# Altium PCB EVB_WBS2_V1.0.0.PcbDoc
Units mm, origin at the board's own origin, x right, y up, seen from the top; angles counter-clockwise.
Board outline 77.17 x 84.58 mm, 2 copper layers (Top, Bottom), stack 1.569 mm thick; 33 components, 22 nets, 145 pads, 163 vias.
Unrouted connection lines stored in the file: 104.
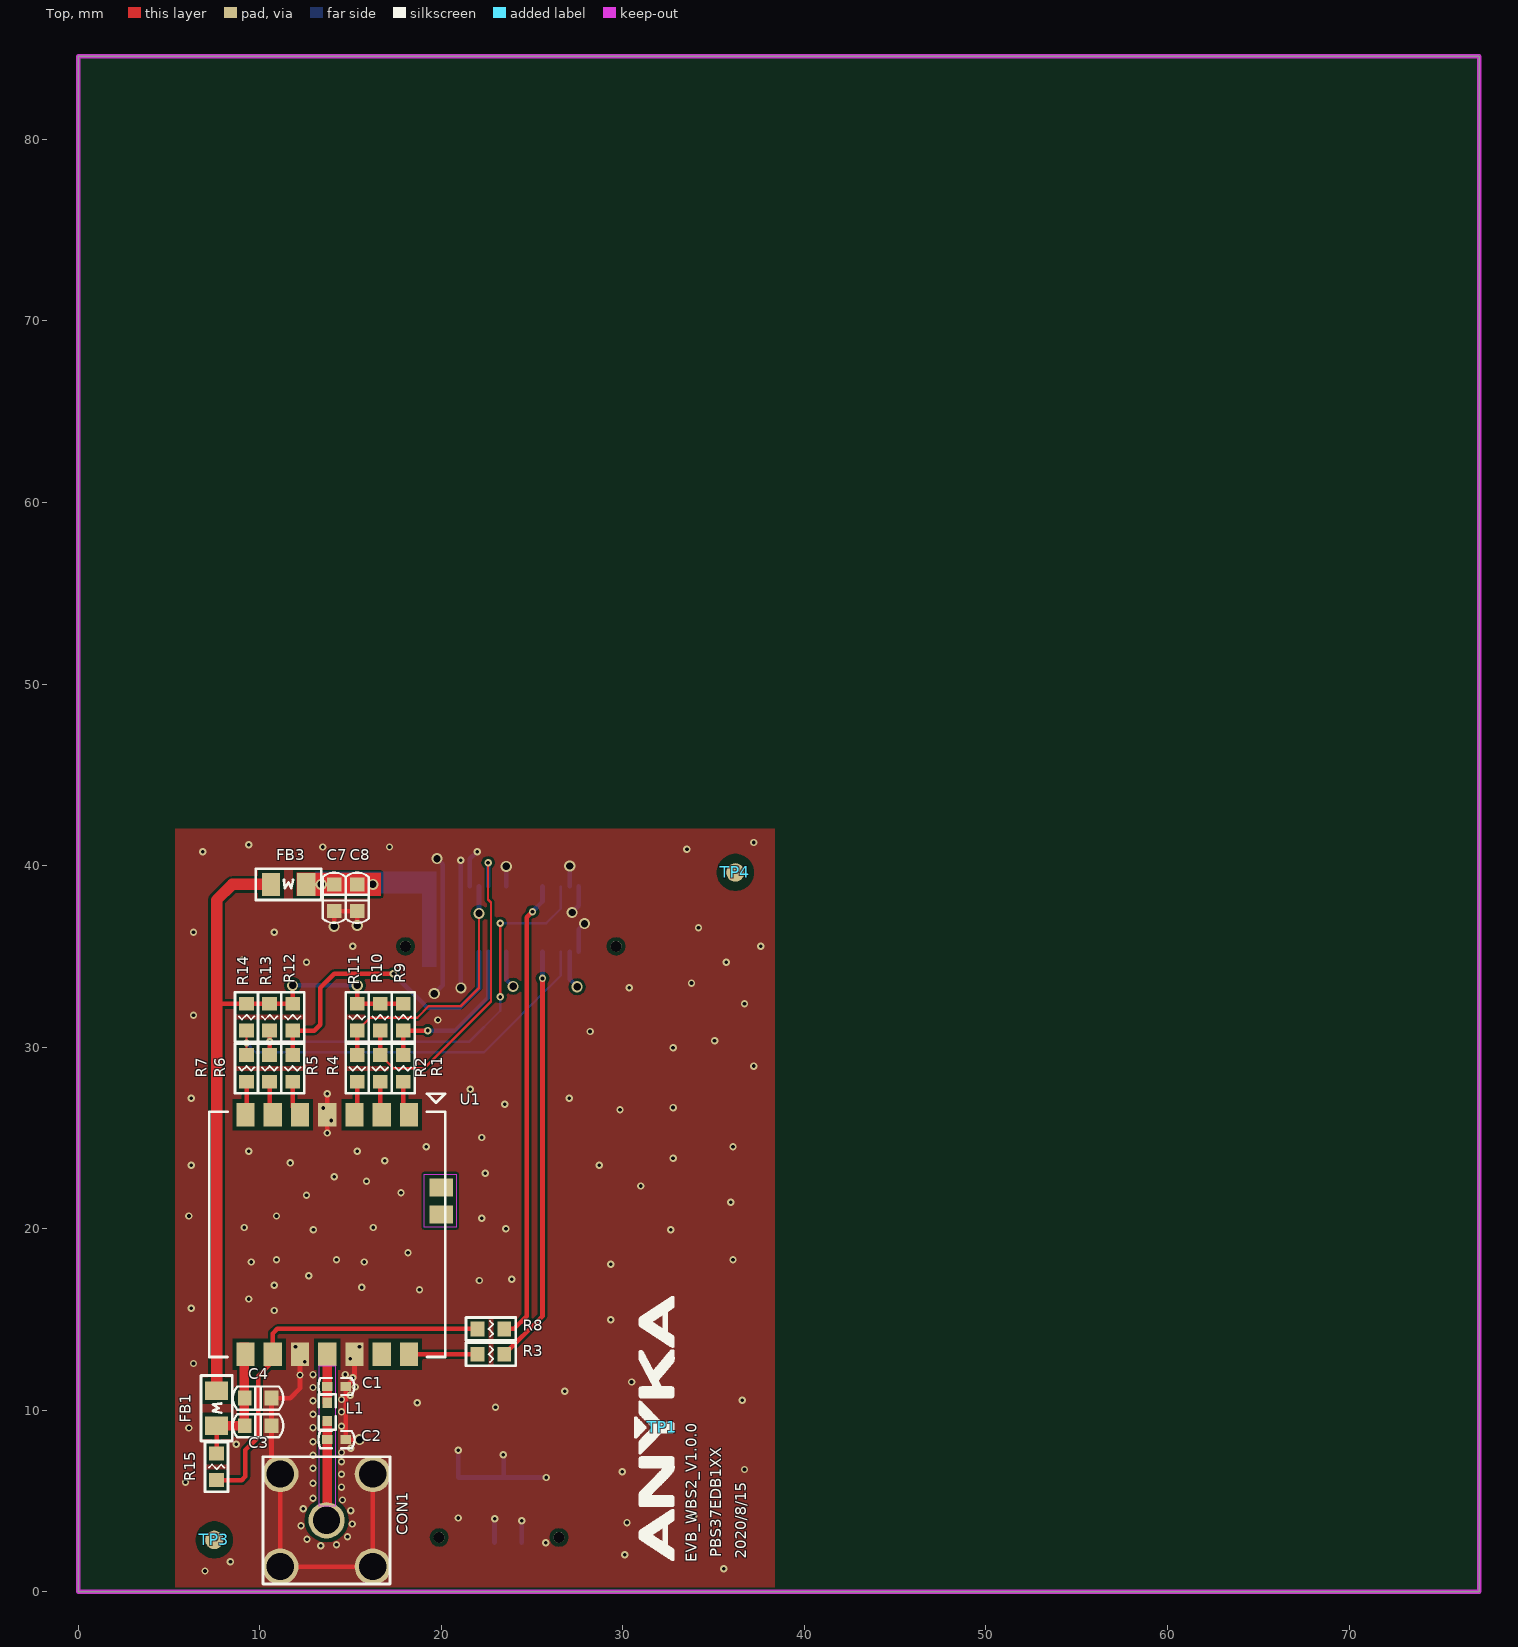
[diagram p0: Top view]
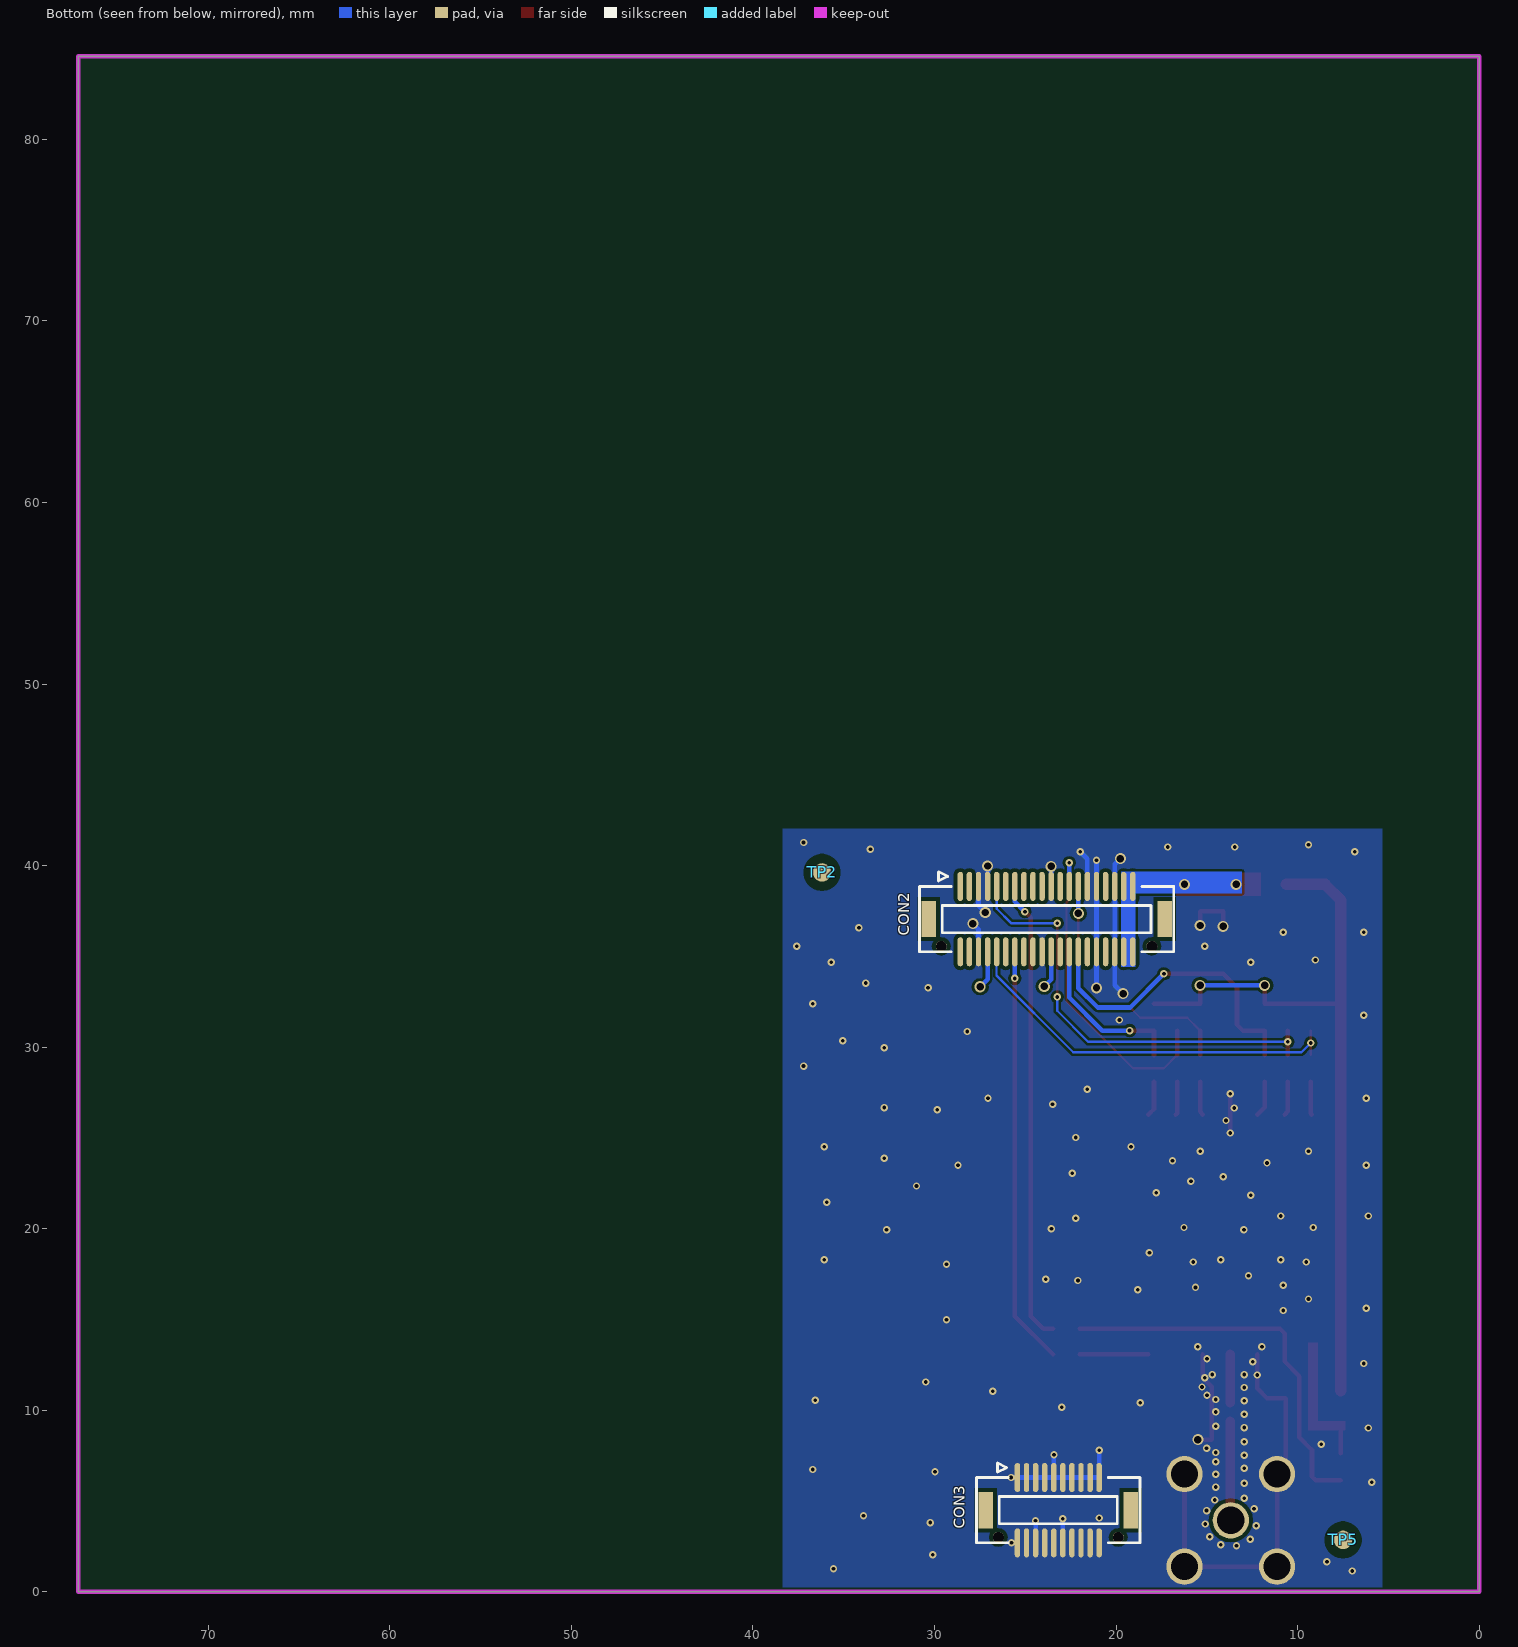
[diagram p1: Bottom view, seen from below]

## Layer stack, top to bottom
Solder Mask Top: solder mask 0.0102, Solder Resist, Dk 3.5
Top: signal copper 0.035
Dielectric 1: dielectric 1.4986, FR-4, Dk 4.3
Bottom: signal copper 0.035
Solder Mask Bottom: solder mask 0.0102, Solder Resist, Dk 3.5

## Board outline
0,0 0,84.582 77.165,84.582 77.165,0

## Design rules (kind name [scope] priority, off if disabled: settings)
AssemblyTestPointUsage [All] p1 off:
AssemblyTestpoint [All] p1 off: testpointundercomponent=TRUE minsize=1.016 maxsize=2.54 preferedsize=1.524 minholesize=0 maxholesize=1.016 preferedholesize=0.813 testpointgrid=0.025 usegrid=TRUE gridtolerance=0 allowsidetop=TRUE allowsidebottom=TRUE
Clearance [All] p1: gap=0.127 ignorepadtopadclearanceinfootprint=TRUE except(0: Arc-Text Track-Text SMDPad-Text THPad-Text Via-Text Fill-Text Poly-Text Region-Text Text-Text; 0.152: Via-Fill Via-Poly Via-Region; 0.203: SMDPad-Fill SMDPad-Poly SMDPad-Region THPad-Fill THPad-Poly THPad-Region)
Clearance Clearance_1 [All] p2: gap=0 ignorepadtopadclearanceinfootprint=TRUE
ComponentClearance "ComponentClearance - Default - DEFAULT" [All] p1 off: gap=0 collisioncheckmode=3 verticalgap=0.254 showdistances=FALSE
DiffPairsRouting [All] p1 off: maxlimit=0.254 minlimit=0.254 mostfreqgap=0.254 toplayer_minwidth=0.381 toplayer_maxwidth=0.381 toplayer_prefwidth=0.381 bottomlayer_minwidth=0.381 bottomlayer_maxwidth=0.381 bottomlayer_prefwidth=0.381 maxuncoupledlength=12.7
FabricationTestPointUsage [All] p1 off: valid=0 allowmultiple=FALSE
FabricationTestpoint [All] p1 off: side=3 testpointundercomponent=TRUE minsize=1.016 maxsize=2.54 preferedsize=1.524 minholesize=0 maxholesize=1.016 preferedholesize=0.813 testpointgrid=0.025 allowsidetop=TRUE allowsidebottom=TRUE usegrid=TRUE gridtolerance=0
FanoutControl Fanout_BGA [IsBGA] p1 off: bgadir=Out bgaviamode=Centered fanoutstyle=Auto fanoutdirection=Alternating viagrid=0.025 // Fanout_BGA (Default Rule)
FanoutControl Fanout_LCC [IsLCC] p2 off: bgadir=Out bgaviamode=Centered fanoutstyle=Auto fanoutdirection=Alternating viagrid=0.025 // Fanout_LCC (Default Rule)
FanoutControl Fanout_Small [(CompPinCount < 5)] p3 off: bgadir=Out bgaviamode=Centered fanoutstyle=Auto fanoutdirection=OutThenIn viagrid=0.025 // Fanout_Small (Default Rule)
FanoutControl Fanout_SOIC [IsSOIC] p4 off: bgadir=Out bgaviamode=Centered fanoutstyle=Auto fanoutdirection=Alternating viagrid=0.025 // Fanout_SOIC (Default Rule)
FanoutControl Fanout_Default [All] p5 off: bgadir=Out bgaviamode=Centered fanoutstyle=Auto fanoutdirection=Alternating viagrid=0.025 // Fanout_Default (Default Rule)
Height [All] p1 off: minheight=0 maxheight=25.4 prefheight=12.7
HoleSize [All] p1 off: absolutevalues=TRUE maxlimit=2.54 minlimit=0.025 maxpercent=80.000 minpercent=20.000
HoleToHoleClearance "HoleToHoleClearance - Default - DEFAULT" [All] p1 off: gap=0 allowstackedmicrovias=TRUE
LayerPairs [All] p1 off: enforce=TRUE
Length "Default Length" [All] p1 off: maxlimit=1270 minlimit=0
MaxMinImpedance "Default Impedance" [All] p1 off: minimum=50.00 maximum=150.0
MinimumSolderMaskSliver [All] p1 off: minsoldermaskwidth=0.254
NetAntennae [All] p1 off: netantennaetolerance=0
ParallelSegment "Default Parallel Segment Same Layer" [All] p1 off: limit=25.4 gap=5.08
ParallelSegment "Default Parallel Segment Adjasent" [All] p2 off: limit=25.4 gap=5.08
PasteMaskExpansion [All] p1 off: expansion=0.102
PlaneClearance [All] p1 off: clearance=0.508
PlaneConnect [All] p1 off: planeconnectstyle=Direct reliefexpansion=0.508 reliefentries=4 reliefconductorwidth=0.254 reliefairgap=0.254
PolygonConnect [All] p1: connectstyle=Direct reliefconductorwidth=0.254 reliefentries=4 polygonreliefangle="90 Angle" airgapwidth=0.254
RoutingCorners [All] p1 off: cornerstyle=45-Degree minsetback=0.254 maxsetback=0.254
RoutingLayers "RoutingLayers - Default - DEFAULT" [All] p1 off: top layer_v5=TRUE bottom layer_v5=TRUE
RoutingPriority "RoutingPriority - Default - DEFAULT" [All] p1 off: routingpriority=0
RoutingTopology "Default Routing Topology" [All] p1 off: topology=Shortest
RoutingVias "RoutingVias - Default - DEFAULT" [All] p1 off: holewidth=0.203 width=0.406 viastyle="Through Hole" minholewidth=0.203 minwidth=0.406 maxholewidth=0.406 maxwidth=0.61
SMDToCorner "SMDToCorner - Default - DEFAULT" [All] p1 off: distance=0
ShortCircuit ShortCircuit_1 [InNet('GND') vs InNet('GND')] p2: allowed=TRUE
SilkToSilkClearance [All] p1 off: silktosilkclearance=0.254
SilkToSolderMaskClearance [IsPad] p1 off: minsilkscreentomaskgap=0.254 clearancetoexposedcopper=TRUE
SolderMaskExpansion [All] p1 off: expansion=0.102 istentingtop=TRUE useseparateexpansions=TRUE expansionbottom=0.102 istentingbottom=TRUE
Width "Default Width" [All] p1 off: maxlimit=2.54 minlimit=0.127 preferedwidth=0.127 minimp=50.000000 maximp=50.000000 favimp=50.000000
4 further rules are at their usual default settings.

## Classes and differential pairs
component class ATBM6031: C1 C2 C3 C4 C7 C8 CON1 CON2 CON3 FB1 FB3 L1 R1 R2 R3 R4 R5 R6 R7 R8 R9 R10 R11 R12 R13 R14 R15 U1

## Components (designator, comment, footprint, x,y, rotation, side; value= is the part's Value field where it differs from the comment)
C1 "0.5pF" C0402 14.224,11.303 r0 top
C2 "0.5pF" C0402 14.224,8.382 r0 top
C3 "22uF" C0603 9.906,9.144 r0 top
C4 "100nF" C0603 9.906,10.668 r0 top
C7 "4.7uF" C0603 14.097,38.227 r270 top
C8 "10uF" C0603 15.367,38.227 r270 top
CON1 "SMA-KHD-92105001" SMA-KHD-92105001 13.678,3.934 r0 top value=SMA-KHD
CON2 "CON20X2_0MM5_BTB_DF12" CON20X2_0MM5_BTB_DF12_N 23.825,37.053 r0 bottom locked
CON3 "CON10X2_0MM5_BTB_DF12" CON10X2_0MM5_BTB_DF12_N 23.18,4.492 r0 bottom
FB1 "FB0805" FB0805 7.62,10.109 r270 top
FB3 "FB0805" FB0805 11.582,38.964 r0 top
L1 "1.0nH" L0402 13.716,9.906 r270 top
R1 "0R" R0603 17.907,28.829 r90 top
R2 "0R" R0603 16.637,28.829 r90 top
R3 "NC/0R" R0603 22.733,13.081 r180 top
R4 "0R" R0603 15.367,28.829 r90 top
R5 "0R" R0603 11.811,28.829 r90 top
R6 "0R" R0603 10.541,28.829 r90 top
R7 "0R" R0603 9.271,28.829 r90 top
R8 "0R" R0603 22.733,14.478 r180 top
R9 "10K" R0603 17.907,31.648 r90 top
R10 "10K" R0603 16.637,31.648 r90 top
R11 "NC/10K" R0603 15.367,31.648 r90 top
R12 "NC/10K" R0603 11.811,31.648 r90 top
R13 "10K" R0603 10.541,31.648 r90 top
R14 "10K" R0603 9.271,31.648 r90 top
R15 "10K" R0603 7.62,6.883 r270 top
TP1 "LOGO_ANYKA" LOGO_ANYKA 32.156,9.055 r90 top
TP2 "FIDU_40" FIDU_40 36.195,39.624 r180 bottom
TP3 "FIDU_40" FIDU_40 7.493,2.857 r0 top
TP4 "FIDU_40" FIDU_40 36.195,39.624 r0 top
TP5 "FIDU_40" FIDU_40 7.493,2.857 r180 bottom
U1 "ATBM6031" ATBM6031 13.716,19.685 r270 top value=NC/R8782

## Footprints (in the part's own frame and the unit in brackets; to place one, negate y for a bottom-side part, rotate by r counter-clockwise, add the part's x,y. Pads: shape width x height; smd on the part's side, far side on the other; paste and mask are expansions set on the pad)
ATBM6031 [mm]
  rect 1.3x1 smd: 1(-6.6,4.5) 2(-6.6,3) 3(-6.6,1.5) 4(-6.6,0) 5(-6.6,-1.5) 6(-6.6,-3) 7(-6.6,-4.5) 8(6.6,-4.5) 9(6.6,-3) 10(6.6,-1.5) 11(6.6,0) 12(6.6,1.5) 13(6.6,3) 14(6.6,4.5)
  rect 1x1.3 smd: 15(-1.092,6.274) 16(-2.591,6.274)
  silkscreen extent -7.75,-6.5 6.75,6.5
C0402 [mil]
  rect 22x20 smd: 1(-20,0) 2(20,0)
  silkscreen extent -39,-19 39,18
C0603 [mil]
  rect 30x32 smd: 1(-29,0) 2(29,0)
  silkscreen extent -55,-25 55,25
CON10X2_0MM5_BTB_DF12_N [mm]
  oval 0.3x1.6 smd: 1(2.25,-1.8) 2(2.25,1.8) 3(1.75,-1.8) 4(1.75,1.8) 5(1.25,-1.8) 6(1.25,1.8) 7(0.75,-1.8) 8(0.75,1.8) 9(0.25,-1.8) 10(0.25,1.8) 11(-0.25,-1.8) 12(-0.25,1.8) 13(-0.75,-1.8) 14(-0.75,1.8) 15(-1.25,-1.8) 16(-1.25,1.8) 17(-1.75,-1.8) 18(-1.75,1.8) 19(-2.25,-1.8) 20(-2.25,1.8)
  rect 0.8x2 smd: 21(-4,0) 22(4,0)
  round 0.6 hole 0.6 unplated: 23(-3.3,1.5) 24(3.3,1.5)
  silkscreen extent -4.5,-2.6 4.5,1.8
CON20X2_0MM5_BTB_DF12_N [mm]
  oval 0.3x1.6 smd: 1(4.75,-1.8) 2(4.75,1.8) 3(4.25,-1.8) 4(4.25,1.8) 5(3.75,-1.8) 6(3.75,1.8) 7(3.25,-1.8) 8(3.25,1.8) 9(2.75,-1.8) 10(2.75,1.8) 11(2.25,-1.8) 12(2.25,1.8) 13(1.75,-1.8) 14(1.75,1.8) 15(1.25,-1.8) 16(1.25,1.8) 17(0.75,-1.8) 18(0.75,1.8) 19(0.25,-1.8) 20(0.25,1.8) 21(-0.25,-1.8) 22(-0.25,1.8) 23(-0.75,-1.8) 24(-0.75,1.8) 25(-1.25,-1.8) 26(-1.25,1.8) 27(-1.75,-1.8) 28(-1.75,1.8) 29(-2.25,-1.8) 30(-2.25,1.8) 31(-2.75,-1.8) 32(-2.75,1.8) 33(-3.25,-1.8) 34(-3.25,1.8) 35(-3.75,-1.8) 36(-3.75,1.8) 37(-4.25,-1.8) 38(-4.25,1.8) 39(-4.75,-1.8) 40(-4.75,1.8)
  rect 0.8x2 smd: 41(-6.5,0) 42(6.5,0)
  round 0.6 hole 0.6 unplated: 43(-5.8,1.5) 44(5.8,1.5)
  silkscreen extent -7,-2.6 7,1.8
FB0805 [mil]
  rect 40x50 smd: 1(-38,0) 2(38,0)
  silkscreen extent -71,-34 71,34
FIDU_40 [mil]
  round 40 smd far side: 1(0,0)
  round 40 smd: 1(0,0)
  Top pour cut-out: 40,0 40,3.94 38.46,11.67 35.45,18.95 31.07,25.5 25.5,31.07 18.95,35.45 11.67,38.46 3.94,40 0,40 -3.94,40 -11.67,38.46 -18.95,35.45 -25.5,31.07 -31.07,25.5 -35.45,18.95 -38.46,11.67 -40,3.94 -40,0 -40,-3.94 -38.46,-11.67 -35.45,-18.95 -31.07,-25.5 -25.5,-31.07 -18.95,-35.45 -11.67,-38.46 -3.94,-40 0,-40 3.94,-40 11.67,-38.46 18.95,-35.45 25.5,-31.07 31.07,-25.5 35.45,-18.95 38.46,-11.67 40,-3.94 40,0
  Bottom pour cut-out: 40,0 40,3.94 38.46,11.67 35.45,18.95 31.07,25.5 25.5,31.07 18.95,35.45 11.67,38.46 3.94,40 0,40 -3.94,40 -11.67,38.46 -18.95,35.45 -25.5,31.07 -31.07,25.5 -35.45,18.95 -38.46,11.67 -40,3.94 -40,0 -40,-3.94 -38.46,-11.67 -35.45,-18.95 -31.07,-25.5 -25.5,-31.07 -18.95,-35.45 -11.67,-38.46 -3.94,-40 0,-40 3.94,-40 11.67,-38.46 18.95,-35.45 25.5,-31.07 31.07,-25.5 35.45,-18.95 38.46,-11.67 40,-3.94 40,0
L0402 [mil]
  rect 22x20 smd: 1(-20,0) 2(20,0)
  silkscreen extent -38,-19 38,19
LOGO_ANYKA [mm]
  silkscreen extent -7.34,-0.7 7.22,1.5
R0603 [mil]
  rect 30x32 smd: 1(-29,0) 2(29,0)
  silkscreen extent -54,-25 54,25
SMA-KHD-92105001 [mm]
  round 1.999 hole 1.5: 1(0,0) 2(-2.55,2.55) 3(2.55,2.55) 4(-2.55,-2.55) 5(2.55,-2.55)
  silkscreen extent -3.5,-3.5 3.5,3.5

## Part data
C1 C2: library part CC0200R52XX, "C/C,0.5pF,50V,±0.05pF ,0402,Murata", Catalog=陶瓷电容, Part Number=CC0200R52XX
C3: library part CC0302260XX, "C/C,22uF,16V,+/-20%,0603", Catalog=陶瓷电容, Part Number=CC0302260XX
C4: library part CC0301040XX, "C/C,100nF,25V,+/-5%,0603", Catalog=陶瓷电容, Part Number=CC0301040XX
C7: library part CC0304750XX, "C/C,4.7uF,25V,+/-5%,0603", Catalog=陶瓷电容, Part Number=CC0304750XX
C8: library part CC0301060XX, "C/C,10uF,25V,+/-5%,0603", Catalog=陶瓷电容, Part Number=CC0301060XX
CON1: library part CNRFM0515XX, "SMA-KWE,5pin,Normal，弯头正脚内孔，6*6*13&14.5；", Part Number_AK=CNRFM0501XX, Catalog=Connector, Part Number=CNRFM0515XX, PCB DECAL=SMA-KHD-92105001, SOURCE_PATH=I:\PROJECTFILES\CADENCE\AD11\AD11_AK9806_V2.1_20120202.DSN
CON2: library part CNBBM4000XX, "0.5mm ，BTB2*20Pin，SMT，公座，H3.0，DF12#(3.0)-40DS-0.5", Catalog=Connector, Part Number=CNBBM4000XX, PCB DECAL=CON20X2_0MM5_BTB_DF12_BOTTOM
CON3: library part CNBBM2000XX, "0.5mm ，BTB2*10Pin，SMT，公座，H3.0，DF12#(3.0)-20DS-0.5", Catalog=Connector, Part Number=CNBBM2000XX, PCB DECAL=CON10X2_0MM5_BTB_DF12_BOTTOM
FB1 FB3: library part BE0503010XX, "BEAD,PZ2012U301-1R5TF,300R,100MHz,0805", Catalog=贴片磁珠, Part Number=BE0503010XX, Part Number_AK=BE0503010XX, PCB DECAL=FB0805
L1: library part CL0201R00XX, "C/L,1.0nH,0402,LQG15HS1N0S02D", Catalog=贴片电感, Part Number=CL0201R00XX
R1 R2 R3 R4 R5 R6 R7 R8: library part CR0300000XX, "Res,0R,1/10W,+/-5%,0603", Catalog=贴片电阻, Part Number=CR0300000XX
R9 R10 R11 R12 R13 R14 R15: library part CR0310020XX, "Res,10K,1/10W,+/-1%,0603", Catalog=贴片电阻, Part Number=CR0310020XX
U1: library part MDWIFI035XX, "SDIO2.0 WIFI Module,WD_ATBM6031,13.5 *13*1.6mm, ATBM6031,13pin", Part Number_AK=MDWIFI011XX, Catalog=模块, Part Number=MDWIFI035XX, PCB DECAL=BL_R8801MS1

## Via types
v1: diameter 0.406, hole 0.203, Top to Bottom, tented both sides, 146 vias
v2: diameter 0.61, hole 0.406, Top to Bottom, tented both sides, 17 vias

## Nets (pads, with @x,y where several pads share a name; then routed paths per layer and width w, separated by ;. In a path a pad name is that pad's centre, name@x,y a point inside that pad or via, vN(x,y) a via of type N, cw(c..) or ccw(c..) an arc to the next point about the centre after c; other vN are vias at no path point)
GND: C1.2 C2.2 C3.2 C4.2 C7.2 C8.2 CON1.2 CON1.3 CON1.4 CON1.5 CON2.5 CON2.6 CON2.7 CON2.20 CON2.21 CON2.29 CON2.31 CON2.32 CON2.35 CON2.36 CON3.1 CON3.2 CON3.3 CON3.4 CON3.5 CON3.6 CON3.7 CON3.8 CON3.9 CON3.10 CON3.11 CON3.12 CON3.13 CON3.14 CON3.15 CON3.16 CON3.17 CON3.18 CON3.19 CON3.20 U1.4 U1.10 U1.12 | length 66.6
  Top w0.254: U1.10 v1(12.216,11.938) 12.216,11.2 11.684,10.668 C4.2 C3.2 10.643,6.969 CON1.2 CON1.4 CON1.5 CON1.3 ; v1(13.716,25.273) U1.4 v1(13.716,27.432) ; v2(14.097,36.652) C7.2 C8.2 v2(15.367,36.703) ; U1.12 15.216,11.787 C1.2 C2.2 v2(15.494,8.382)
  Bottom w0.254: v2(19.609,32.944) 20.075,33.41 CON2.36 CON2.35 20.075,40.072 v2(19.761,40.386) ; v1(20.93,7.798) CON3.19 CON3.17 CON3.15 CON3.13 CON3.11 CON3.9 ; v2(21.075,33.267) CON2.32 CON2.31 v1(21.075,40.291) ; CON2.29 21.575,40.371 v1(21.971,40.767) ; CON3.12 22.93,4.007 v1(22.936,4.013) ; v1(23.419,7.544) 23.43,7.533 CON3.9 ; CON2.21 v2(23.575,39.958) ; CON3.6 24.43,3.907 v1(24.435,3.912) ; v1(25.781,6.292) CON3.1 CON3.3 CON3.5 CON3.7 CON3.9 ; CON2.7 v2(27.075,39.981) ; v2(27.203,37.414) 27.575,37.786 CON2.5 ; CON2.6 27.575,36.491 v2(27.889,36.805)
  other v1: 6.985,1.143 35.56,1.27 8.382,1.651 30.099,2.032 13.36,2.54 14.224,2.591 25.756,2.692 12.598,2.896 14.834,3.023 12.268,3.632 15.088,3.734 30.226,3.81 20.93,4.064 33.909,4.191 15.011,4.47 12.395,4.572 14.554,5.055 12.929,5.156 14.503,5.766 12.929,5.969 5.905,6.032 14.503,6.477 29.972,6.604 36.703,6.731 12.929,6.807 14.503,7.163 12.929,7.518 14.503,7.671 15.011,7.899 8.7,8.128 12.929,8.255 6.096,9.017 12.929,9.042 14.503,9.119 12.929,9.779 14.503,9.906 22.987,10.16 18.669,10.414 12.929,10.516 36.576,10.541 14.503,10.592 14.986,10.82 26.797,11.049 12.929,11.252 15.265,11.278 30.48,11.557 15.113,11.786 12.929,11.963 14.707,11.963 6.35,12.573 12.471,12.675 14.986,12.827 11.963,13.487 15.494,13.487 29.337,14.986 10.795,15.494 6.223,15.621 9.398,16.129 18.796,16.637 15.621,16.764 10.795,16.891 22.098,17.145 23.876,17.209 12.7,17.399 29.337,18.034 9.525,18.161 15.748,18.161 10.922,18.288 14.224,18.288 36.068,18.288 18.161,18.669 12.954,19.939 32.639,19.939 23.558,20.002 9.144,20.066 16.256,20.066 22.225,20.574 6.096,20.701 10.922,20.701 35.941,21.463 12.573,21.844 17.78,21.971 30.988,22.352 15.875,22.606 14.097,22.86 22.415,23.05 6.223,23.495 28.702,23.495 11.684,23.622 16.891,23.749 32.766,23.876 9.398,24.257 15.367,24.257 19.177,24.511 36.068,24.511 22.225,25.019 13.945,25.959 29.845,26.543 13.487,26.645 32.766,26.67 23.495,26.86 6.223,27.178 27.051,27.178 21.59,27.686 37.211,28.956 32.766,29.972 35.052,30.353 28.194,30.861 19.812,31.496 6.35,31.75 36.703,32.385 30.353,33.274 33.782,33.528 12.573,34.671 35.687,34.671 9.017,34.798 15.113,35.56 37.592,35.56 6.35,36.322 10.795,36.322 34.163,36.576 6.858,40.767 33.528,40.894 13.462,41.021 17.145,41.021 9.398,41.148 37.211,41.275
NETC1_1: C1.1 L1.1 U1.11 | length 2.7
  Top w0.533: L1.1 C1.1 U1.11
NETC2_1: C2.1 CON1.1 L1.2 | length 5.5
  Top w0.533: CON1.1 13.716,3.972 C2.1 L1.2
NETC3_1: C3.1 C4.1 FB1.2 R15.1 U1.8 | length 7
  Top w0.254: R15.1 FB1.2 C3.1 C4.1 9.216,10.715 U1.8
NETC7_1: C7.1 C8.1 CON2.37 CON2.38 CON2.39 CON2.40 FB3.2 | length 11.2
  Top w0.254: FB3.2 v2(13.386,38.964) C7.1 C8.1
  Top w0.635: C8.1 v2(16.231,38.964)
  Bottom w0.254: v2(16.231,38.964) 18.964,38.964 CON2.39 ; CON2.38 CON2.40 CON2.39 ; CON2.37 CON2.39
NETR1_1: R1.1 U1.1 | length 1.9
  Top w0.254: R1.1 17.907,26.594 U1.1
NETR2_1: R2.1 U1.2 | length 1.8
  Top w0.254: R2.1 16.637,26.364 U1.2
NETR3_2: R3.2 U1.14 | length 3.8
  Top w0.254: U1.14 R3.2
NETR4_1: R4.1 U1.3 | length 1.9
  Top w0.254: U1.3 15.367,26.436 R4.1
NETR5_1: R5.1 U1.5 | length 2
  Top w0.254: R5.1 11.811,26.69 U1.5
NETR6_1: R6.1 U1.6 | length 1.9
  Top w0.254: R6.1 10.541,26.46 U1.6
NETR7_1: R7.1 U1.7 | length 1.8
  Top w0.254: U1.7 9.271,26.34 R7.1
NETR8_2: R8.2 R15.2 U1.9 | length 21.6
  Top w0.254: R15.2 9.004,6.147 9.207,6.35 9.207,7.81 9.906,8.509 9.906,11.874 10.716,12.685 U1.9 10.716,14.224 10.97,14.478 19.698,14.478 R8.2
WIFI_3V3: FB1.1 FB3.1 R9.2 R10.2 R11.2 R12.2 R13.2 R14.2 | length 42.7
  Top w0.254: 7.62,32.385 R14.2 R13.2 R12.2 v2(11.811,33.401) ; v2(15.367,33.401) R11.2 R10.2 R9.2
  Top w0.635: FB1.1 7.62,32.385 7.62,38.1 8.484,38.964 FB3.1
  Bottom w0.254: v2(11.811,33.401) v2(15.367,33.401)
WIFI_CLK: CON2.28 R5.2 R12.1 | length 17.3
  Top w0.254: R5.2 R12.1 13.005,30.912 13.335,31.242 13.335,33.274 14.097,34.036 v1(17.361,34.036)
  Bottom w0.254: v1(17.361,34.036) 19.215,32.182 21.006,32.182 22.075,33.251 CON2.28
WIFI_CMD: CON2.27 R4.2 R11.1 | length 14.6
  Top w0.127: R11.1 16.078,31.623 18.669,31.623 19.304,32.258 21.082,32.258 22.075,33.251 v2(22.075,37.366)
  Top w0.254: R4.2 R11.1
  Bottom w0.254: v2(22.075,37.366) CON2.27
WIFI_D0: CON2.9 R6.2 R13.1 | length 24.5
  Top w0.127: v1(23.241,32.766) v1(23.241,36.83)
  Top w0.254: R6.2 v1(10.541,30.29) R13.1
  Bottom w0.127: v1(10.541,30.29) 13.97,30.29 21.526,30.29 23.241,32.004 v1(23.241,32.766) ; v1(23.241,36.83) 25.781,36.83 26.575,37.624 CON2.9
WIFI_D1: CON2.10 R7.2 R14.1 | length 22.6
  Top w0.127: R7.2 R14.1 v1(9.271,30.226)
  Bottom w0.127: v1(9.271,30.226) 9.779,29.718 22.352,29.718 26.581,33.947 26.581,35.247 CON2.10
WIFI_D2: CON2.26 R1.2 R9.1 | length 9.3
  Top w0.254: R1.2 R9.1 v1(19.253,30.912)
  Bottom w0.254: v1(19.253,30.912) 20.752,30.912 22.575,32.735 CON2.26
WIFI_D3: CON2.25 R2.2 R10.1 | length 18.3
  Top w0.127: R2.2 17.374,28.829 19.05,28.829 22.733,32.512 22.733,37.973 22.575,38.131 v1(22.575,40.163)
  Top w0.254: R2.2 R10.1
  Bottom w0.254: CON2.25 v1(22.575,40.163)
WIFI_INT: CON2.14 R3.1 | length 23
  Top w0.254: R3.1 25.575,15.187 v1(25.575,33.785)
  Bottom w0.254: v1(25.575,33.785) CON2.14
WIFI_RST: CON2.13 R8.1 | length 25.6
  Top w0.254: R8.1 24.003,14.478 24.701,15.176 24.701,32.067 24.701,37.148 v1(25.019,37.465)
  Bottom w0.254: v1(25.019,37.465) 25.575,38.021 CON2.13
pads on no net: CON2.1 CON2.2 CON2.3 CON2.4 CON2.8 CON2.11 CON2.12 CON2.15 CON2.16 CON2.17 CON2.18 CON2.19 CON2.22 CON2.23 CON2.24 CON2.30 CON2.33 CON2.34 CON2.41 CON2.42 CON2.43 CON2.44 CON3.21 CON3.22 CON3.23 CON3.24 TP2.1 TP3.1 TP4.1 TP5.1 U1.13 U1.15 U1.16
copper on no net: | length 4.2
  Bottom w0.254: 23.575,35.253 23.575,33.727 v2(23.952,33.35) ; 27.075,35.253 27.075,33.732 v2(27.483,33.325)

## Polygon pours and split planes (outlines as drawn)
GND on Top "Top-No Net" (solid, remove dead copper, pour order 4): 5.334,0.254 38.354,0.254 38.354,42.037 5.334,42.037
GND on Bottom "Bottom-No Net" (solid, remove dead copper, pour order 5): 5.334,42.037 38.354,42.037 38.354,0.254 5.334,0.254

## Keep-outs
Top:
  region: 19.05,22.987 20.828,22.987 20.828,20.066 19.05,20.066 19.05,22.987
  region: 13.284,12.446 14.148,12.446 14.148,4.699 13.284,4.699 13.284,12.446
Keep-Out Layer:
  the board outline again, w0.254

## Other copper
Top:
  rectangle net NETC3_1: 7.366,8.89 9.398,9.398
  region net NETC3_1: 8.89,13.716 8.89,8.89 9.398,8.89 9.398,13.716
  region net NETC7_1: 12.04,39.599 16.675,39.599 16.675,38.329 12.04,38.329 12.04,39.599
Bottom:
  region net NETC7_1: 13.068,38.481 13.068,39.662 19.71,39.662 19.71,34.417 18.948,34.417 18.948,38.481
Multi-Layer:
  text "_ _ _ V_CUT" at 71.907,84.76 h0.51 r90
  text "_ _ _ V_CUT" at 38.405,84.709 h0.51 r90
  text "_ _ _ V_CUT" at 4.902,84.684 h0.51 r90
  text "_ _ _ V_CUT" at 76.251,42.456 h0.51

## Silkscreen, mask and mechanical layers (free items; w line width, h text height)
Silkscreen Top:
  text "PBS37EDB1XX" at 35.631,1.911 h1.02 r90
  text "2020/8/15" at 37.028,1.818 h1.02 r90
  text "EVB_WBS2_V1.0.0" at 34.277,1.628 h1.02 r90
Mechanical 3:
  lines w0.127: -1.016,42.291 5.08,42.291 ; 5.08,0 5.08,42.291 ; 5.08,85.344 5.08,42.291 ; 38.583,0 38.583,42.291 ; 38.583,84.582 38.583,42.291 ; 38.608,0 38.583,42.291 ; 78.74,42.291 72.085,42.291 ; 0,0 77.165,0 ; 0,0 0,84.582 ; 0,0 77.165,0 ; 0,0 0,84.582 ; 0,84.582 77.165,84.582 ; 0,84.582 72.085,84.582 ; 5.08,42.291 38.583,42.291 ; 38.583,42.291 72.085,42.291 ; 72.085,42.291 72.085,0 72.085,84.582 ; 72.085,42.291 72.085,84.582 ; 72.085,84.582 77.165,84.582 ; 77.165,0 77.165,84.582 ; 77.165,0 77.165,84.582

## Text inside footprints (layer, text, board x,y; h text height)
FB1: Top Assembly "FB12" at 7.925,9.291 h0.51 r90
FB3: Top Assembly "FB12" at 12.401,39.268 h0.51 r180